# EAGLE board E-inkV0.9 (EAGLE 6.3)
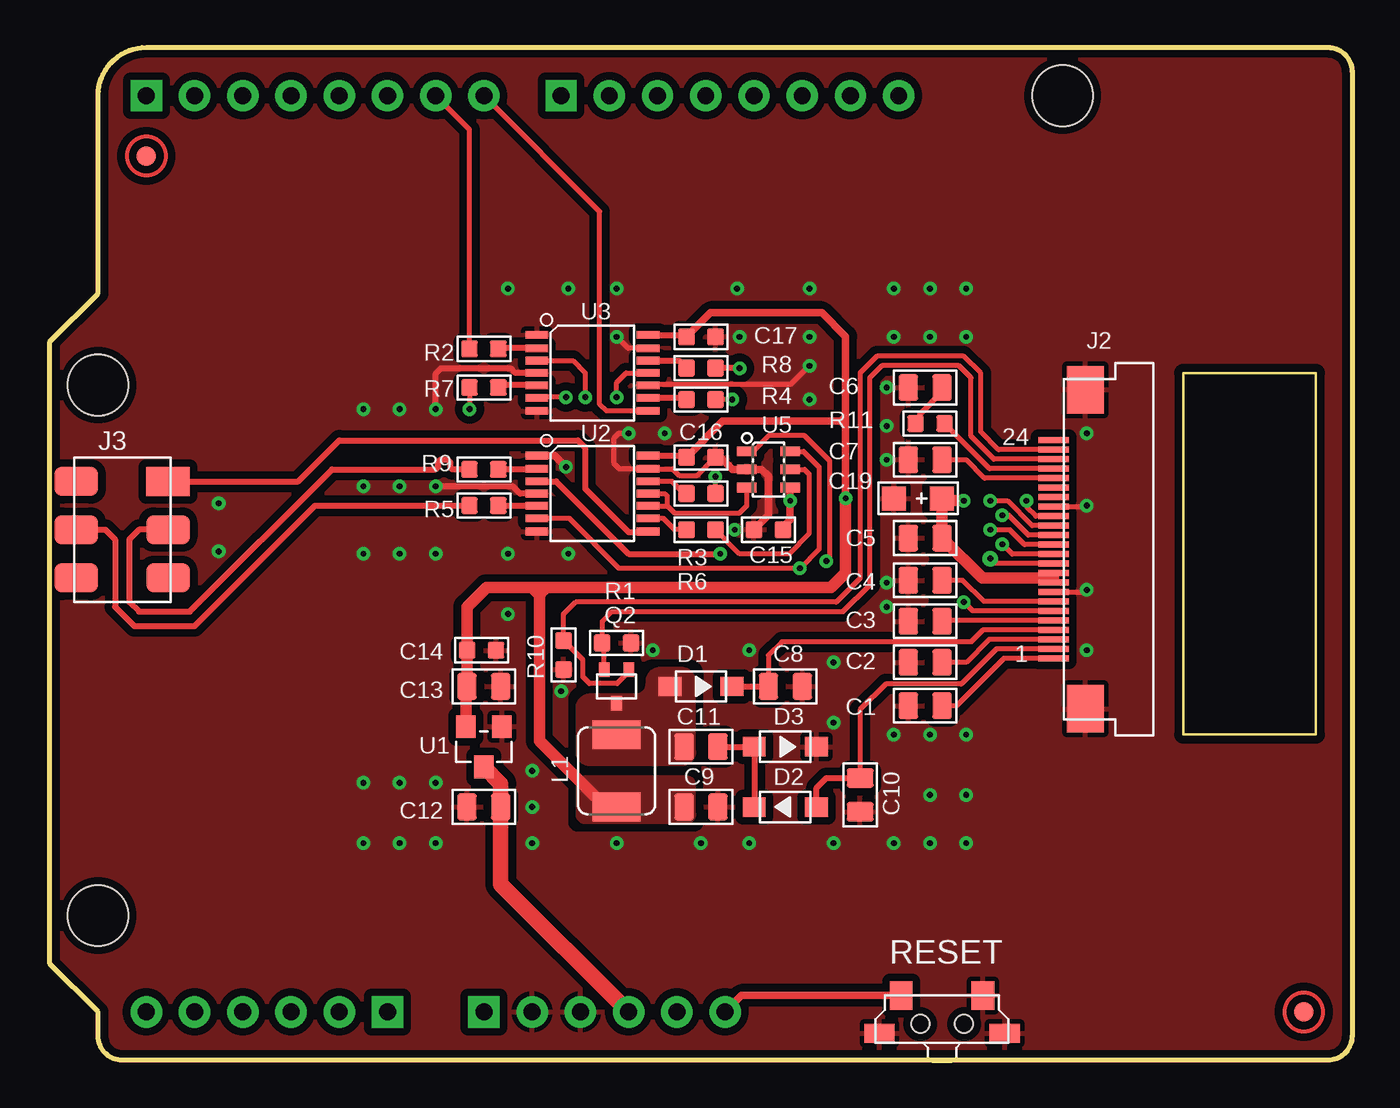
[diagram p0: board, top side]
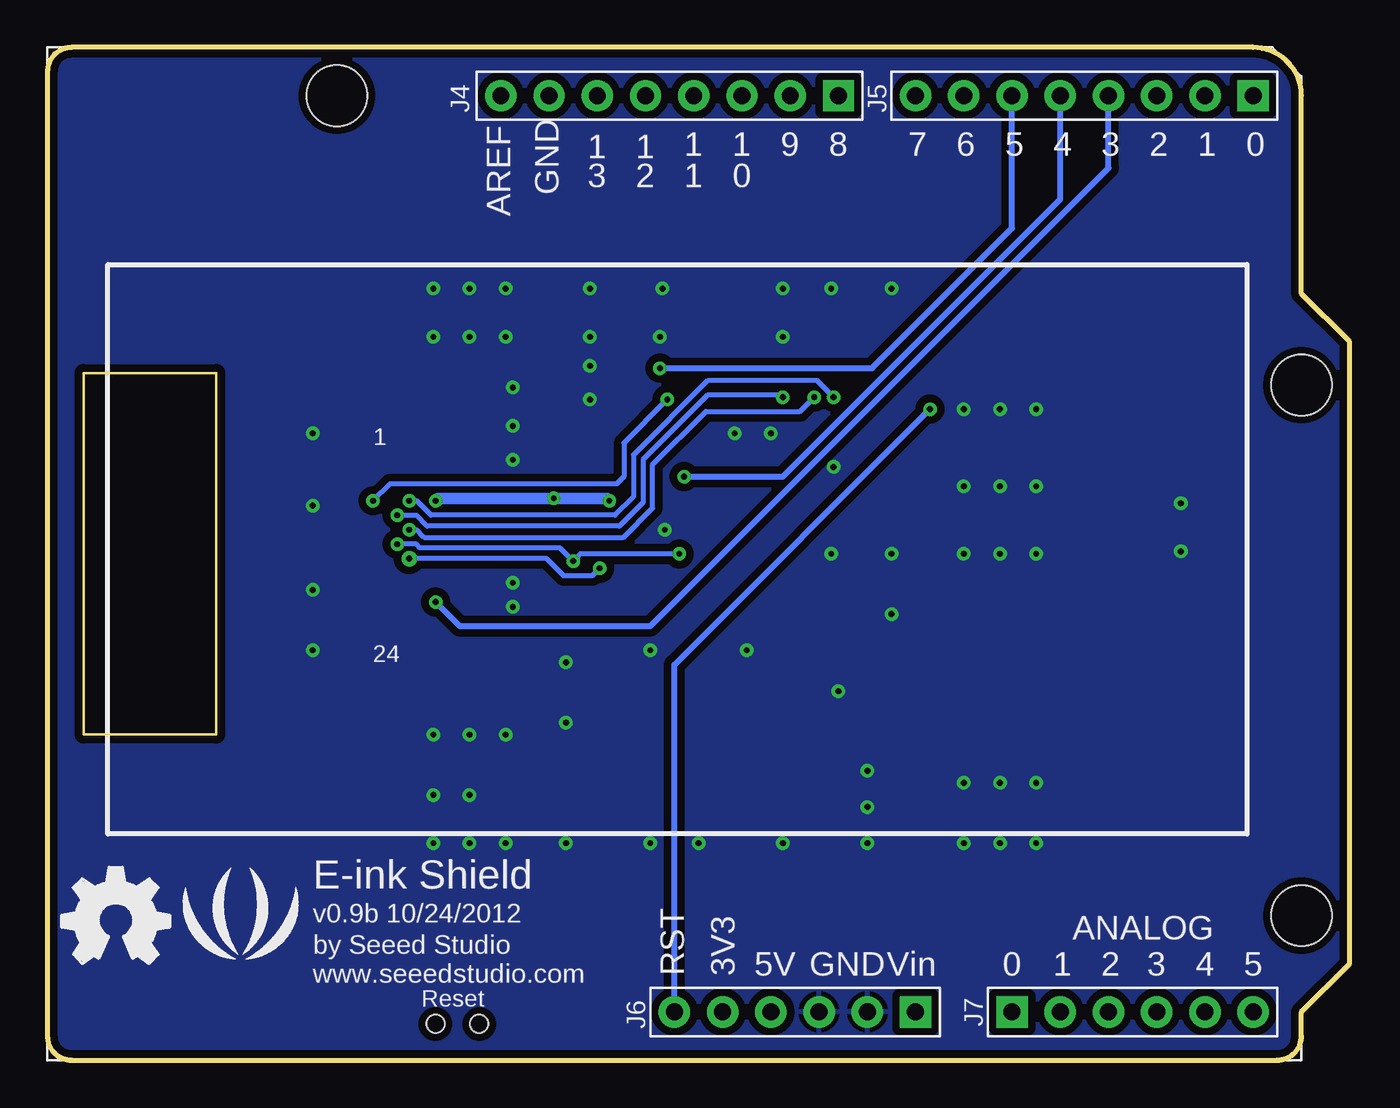
[diagram p1: board, bottom side, seen from below]

Size 68.58 x 53.34 mm. Coordinates in mm from the lower left corner, seen from the top.
Outline: 66.67,36.19 59.69,36.19 59.69,17.14 66.67,17.14 66.67,36.19
Outline: 68.58,52.07 68.58,1.27 arc-90 67.31,0 3.81,0 arc-90 2.54,1.27 2.54,2.54 0,5.08 0,37.85 2.54,40.39 2.54,50.8 arc-90 5.08,53.34 67.31,53.34 arc-90 68.58,52.07
Copper layers (1*16): Top 0.035mm / dielectric 1.5mm / Bottom 0.035mm
Design rules "default": minimum track width 10mil, minimum drill 12mil, track to track 8mil, track to pad 8mil, pad to pad 8mil, via to via 8mil, smd to smd 0mil, copper to edge 10mil, drill to drill 8mil, minimum pad ring 10mil, minimum via ring 8mil, stop-mask expansion 4mil, vias tented up to drill 100mil, thermal gap 10mil

## Footprints (pad centres in the part's own frame; a part is rotated, then mirrored left to right if it is on the bottom)
C0805 = smd 1.016 x 1.397: 1 -0.889,0; 2 0.889,0
C0603 = smd 0.889 x 0.889: 1 -0.762,0; 2 0.762,0
AVX-A = smd 1.27 x 1.27: + -1.27,0; - 1.27,0
SOD123-2.7X1.6 = smd 1.2 x 1.02: 1 -1.635,0; 2 1.635,0
24P-0.5 = smd 0.3 x 1.6: 1 -5.75,0.05; 2 -5.25,0.05; 3 -4.75,0.05; 4 -4.25,0.05; 5 -3.75,0.05; 6 -3.25,0.05; 7 -2.75,0.05; 8 -2.25,0.05; 9 -1.75,0.05; 10 -1.25,0.05; 11 -0.75,0.05; 12 -0.25,0.05; 13 0.25,0.05; 14 0.75,0.05; 15 1.25,0.05; 16 1.75,0.05; 17 2.25,0.05; 18 2.75,0.05; 19 3.25,0.05; 20 3.75,0.05; 21 4.25,0.05; 22 4.75,0.05; 23 5.25,0.05; 24 5.75,0.05 | smd 2.5 x 1.95: P1 -8.4,-1.625; P2 8.4,-1.625
1616BZ = smd 1.524 x 2.54: 1 -1.905,0; 2 1.905,0
ROUND-MARK-1.0 = smd 1.016 x 1.016: P$1 0,0
SOT323 = smd 0.559 x 0.762: 1 -0.65,-0.889; 2 0.65,-0.889; 3 0,0.889
R0603 = smd 0.889 x 0.889: 1 -0.762,0; 2 0.762,0
FOR_TEST_ALBERT_V6_4P-SMD-7X3.5X3.5 = smd 1.2 x 1.5: 1 -2.15,1.5; 2 2.15,1.5 | smd 1.6 x 1: S1 -3.3,-0.5; S2 3.3,-0.5 | hole 0.95: -1.15,0; 1.15,0
SOT23 = smd 1.016 x 1.2: 1 -0.95,-1.06; 2 0.95,-1.06; 3 0,1.06
TSSOP14 = smd 0.4 x 1.2: 1 -2,-2.925; 2 -1.3,-2.925; 3 -0.65,-2.925; 4 0,-2.925; 5 0.65,-2.925; 6 1.3,-2.925; 7 2,-2.925; 8 2,2.925; 9 1.3,2.925; 10 0.65,2.925; 11 0,2.925; 12 -0.65,2.925; 13 -1.3,2.925; 14 -2,2.925
ARDUINO-ISP-SMD = drill 0.889 pad 1.651 square: 1 63.5,50.8; 9 41.656,50.8; 17 50.8,2.54; 23 45.72,2.54 | drill 0.889 pad 1.651: 2 60.96,50.8; 3 58.42,50.8; 4 55.88,50.8; 5 53.34,50.8; 6 50.8,50.8; 7 48.26,50.8; 8 45.72,50.8; 10 39.116,50.8; 11 36.576,50.8; 12 34.036,50.8; 13 31.496,50.8; 14 28.956,50.8; 15 26.416,50.8; 16 23.876,50.8; 18 53.34,2.54; 19 55.88,2.54; 20 58.42,2.54; 21 60.96,2.54; 22 63.5,2.54; 24 43.18,2.54; 25 40.64,2.54; 26 38.1,2.54; 27 35.56,2.54; 28 33.02,2.54 | smd 2.286 x 1.524 bottom: 31 67.183,30.48; 32 67.183,27.94; 33 67.183,25.4; 34 62.357,25.4; 35 62.357,27.94; 36 62.357,30.48 | hole 3.2: 15.24,50.8; 66.04,35.56; 66.04,7.62
SOT23-6 = smd 0.508 x 1.016: 1 -0.95,-1.143; 2 0,-1.143; 3 0.95,-1.143; 4 0.95,1.143; 5 0,1.143; 6 -0.95,1.143

## Placement (x,y rotation side)
C1  1uF/6V  [C0805]  46.1,18.67 180 top
C2  1uF/25V  [C0805]  46.1,20.96 0 top
C3  1uF/25V  [C0805]  46.1,23.11 0 top
C4  1uF/25V  [C0805]  46.1,25.27 180 top
C5  1uF/25V  [C0805]  46.1,27.5 180 top
C6  1uF/25V  [C0805]  46.1,35.43 0 top
C7  1uF/25V  [C0805]  46.1,31.62 0 top
C8  1uF/50V  [C0805]  38.73,19.68 0 top
C9  10uF  [C0805]  34.29,13.33 0 top
C10  1uF/50V  [C0805]  42.67,13.97 270 top
C11  4.7uF/50V  [C0805]  34.29,16.51 180 top
C12  1uF  [C0805]  22.86,13.33 0 top
C13  1uF  [C0805]  22.86,19.68 180 top
C14  100nF  [C0603]  22.73,21.59 180 top
C15  100nF  [C0603]  37.85,27.94 180 top
C16  100nF  [C0603]  34.29,31.75 180 top
C17  100nF  [C0603]  34.29,38.1 180 top
C19  10uF  [AVX-A]  45.72,29.59 180 top
D1  B0540W  [SOD123-2.7X1.6]  34.29,19.68 0 top
D2  B0540W  [SOD123-2.7X1.6]  38.73,13.33 180 top
D3  B0540W  [SOD123-2.7X1.6]  38.73,16.51 0 top
J2  FPC_CONNECTOR  [24P-0.5]  52.9,26.91 90 top
L1  CSAC0420-10R/10uH  [1616BZ]  29.84,15.24 90 top
P1  [ROUND-MARK-1.0]  5.08,47.62 0 top
P2  [ROUND-MARK-1.0]  66.04,2.54 0 top
Q2  SI1304BDL  [SOT323]  29.84,19.68 180 top
R1  0.47  [R0603]  29.84,21.97 0 top
R2  3K3  [R0603]  22.86,37.46 0 top
R3  3K3  [R0603]  34.29,29.85 180 top
R4  3K3  [R0603]  34.29,34.8 180 top
R5  3K3  [R0603]  22.86,29.21 0 top
R6  3K3  [R0603]  34.29,27.94 180 top
R7  3K3  [R0603]  22.86,35.43 0 top
R8  3K3  [R0603]  34.29,36.45 180 top
R9  3K3  [R0603]  22.86,31.11 0 top
R10  100K  [R0603]  27.05,21.34 90 top
R11  1K  [R0603]  46.35,33.53 0 top
RESET  [FOR_TEST_ALBERT_V6_4P-SMD-7X3.5X3.5]  46.99,1.9 0 top
U1  XC6206MR  [SOT23]  22.86,16.51 180 top
U2  74VHC125PW  [TSSOP14]  28.57,29.85 270 top
U3  74VHC125PW  [TSSOP14]  28.57,36.19 270 top
U4  ARDUINO  [ARDUINO-ISP-SMD]  68.58,0 0 bottom
U5  GT20L16P1Y  [SOT23-6]  37.85,31.11 270 top
U$25  [LOGO_SILK]  58.42,6.99 0 bottom
U$26  [OSHW_FILLX200_NOTEXT]  67.82,5.08 0 bottom

## Library data of the parts
C1-C17 C19 D1-D3 L1 R1-R11 = Discrete
J2 Q2 U2 U3 U5 = template
P1 P2 = Discrete; PARTNO: DNP
RESET = TFT_Touch
U1 = IC
U4 = moudle
U$25 U$26 = Logo

## Nets
3V3: C5.1 C9.1 C13.2 C14.2 C15.1 C16.2 C17.2 C19.+ J2.9 J2.10 L1.1 U1.2 U2.14 U3.14 U5.4
5V: C12.2 U1.3 U4.26
BUSY: U3.8 U4.8
BUSY#: J2.16 R4.1
CS1: R2.1 U4.7
CS2: R3.1 U4.5
CS#: J2.13 U3.3
D/C: R8.1 U4.6
D/C#: J2.14 U3.11
GDR: J2.23 Q2.1 R10.2
GND: C1.2 C2.1 C3.1 C4.2 C5.2 C6.1 C7.1 C8.2 C9.2 C10.2 C12.1 C13.1 C14.1 C15.2 C16.1 C17.1 C19.- D3.2 J2.8 J2.17 J2.P1 J2.P2 R1.2 R10.1 RESET.2 RESET.S1 RESET.S2 U1.1 U2.1 U2.4 U2.7 U2.13 U3.1 U3.4 U3.7 U3.10 U3.13 U4.24 U4.25 U5.2
GT_CS: U2.10 U2.11 U5.3
GT_SO: R6.1 U5.5
MISO: U2.8 U4.36
MOSI: R5.1 U4.32
N$1: C11.1 D2.2 D3.1
N$2: C11.2 D1.1 L1.2 Q2.3
N$3: R6.2 U2.9
N$4: R9.2 U2.2
N$5: R4.2 U3.9
N$6: R2.2 U3.2
N$7: R7.2 U3.5
N$8: R3.2 U2.12
N$9: R5.2 U2.5
N$10: R8.2 U3.12
N$12: C6.2 R11.1
NC: J2.24
PREVGH: C8.1 D1.2 J2.4
PREVGL: C10.1 D2.1 J2.2
RES#: J2.15 U3.6
RESE: J2.22 Q2.2 R1.1
RST: R7.1 RESET.1 U4.28
SCK: R9.1 U4.35
SCLK: J2.12 U2.3 U5.1
SI: J2.11 U2.6 U5.6
TSCL: J2.19
TSDA: J2.18
VCOM: C1.1 J2.1
VDD: C4.1 J2.7
VGH: C7.2 J2.20
VGL: J2.21 R11.2
VPP: J2.6 U4.4
VSH: C3.2 J2.5
VSL: C2.2 J2.3

## Tracks (layer width: path | path; a pad name or v marks a point on that pad's centre or on a via)
3V3  (via drill 0.3 pad 0.64)
  Top 0.254: 33.4,13.59 C9.1 | J2.10 52.85,25.38 J2.9
  Top 0.305: U3.14 33.43,38.19 C17.2 | U2.14 33.43,31.85 C16.2
  Top 0.406: C15.1 38.61,28.07 38.99,28.45 v38.99,29.46 U5.4 | v41.91,29.59 41.91,33.4 | 41.91,33.4 41.91,33.66 | 41.91,33.66 41.91,33.91 | 41.91,33.91 41.91,38.11 40.65,39.37 34.8,39.37 C17.2 | C16.2 35.43,33.66 41.66,33.66 | 41.66,33.66 41.91,33.66 | 41.66,33.66 41.91,33.91 | 41.66,33.66 41.91,33.4
  Top 0.61: C5.1 C19.+ 46.99,29.46 v48.13,29.46 | 25.4,24.89 22.99,24.89 21.97,23.88 C14.2 C13.2 21.91,19.62 U1.2 | 25.4,24.89 25.78,24.89 | 25.78,24.89 41.15,24.89 41.91,25.65 v41.91,29.59 | 29.02,13.59 25.78,16.83 25.78,24.51 | 25.78,24.51 25.78,24.89 | 25.78,24.51 26.03,24.76 | 25.78,24.51 25.4,24.89 | C5.1 46.99,27.18 | 52.85,25.38 49.1,25.38 C5.1
  Bottom 0.61: v38.99,29.46 39.12,29.59 v41.91,29.59 48.01,29.59 v48.13,29.46
  pour Top (isolate 0.254, no thermals): 28.19,12.57 33.53,12.57 arc90 33.91,12.95 33.91,14.48 arc90 33.53,14.86 28.19,14.86 arc90 27.81,14.48 27.81,12.95 arc90
5V
  Top 0.813: U1.3 23.75,14.56 C12.2 23.75,9.27 U4.26
BUSY
  Top 0.254: 31.27,34.19 29.3,34.19 28.96,34.54 28.96,44.7 U4.8
  Top 0.305: U3.8 31.27,34.19
BUSY#  (via drill 0.3 pad 0.64)
  Top 0.254: v35.94,34.8 R4.1 | J2.16 51.92,28.66 51.43,29.15 v51.43,29.46
  Bottom 0.254: v35.94,34.8 38.23,32.51 38.23,30.73 38.61,30.35 39.12,30.35 50.55,30.35 v51.43,29.46
CS1
  Top 0.254: R2.1 22.1,49.02 U4.7
CS2  (via drill 0.3 pad 0.64)
  Top 0.254: R3.1 v35.05,30.73
  Bottom 0.305: v35.05,30.73 29.84,30.73 15.24,45.34 U4.5
CS#  (via drill 0.3 pad 0.64)
  Top 0.254: 25.66,36.83 U3.3 27.54,36.84 28.19,36.19 v28.19,34.92 | J2.13 51.33,27.16 50.55,27.94 v49.53,27.94
  Bottom 0.254: v28.19,34.92 28.96,34.16 33.91,34.16 36.7,31.37 36.7,29.08 38.25,27.53 48.74,27.53 49.15,27.94 v49.53,27.94
D/C  (via drill 0.3 pad 0.64)
  Top 0.305: v36.32,36.45 R8.1
  Bottom 0.305: U4.6 17.78,43.81 25.15,36.45 v36.32,36.45
D/C#  (via drill 0.3 pad 0.64)
  Top 0.254: v29.84,34.92 29.84,35.69 30.35,36.19 U3.11 | J2.14 51.52,27.66 50.48,28.7 v50.16,28.7
  Bottom 0.254: v29.84,34.92 29.97,35.05 33.78,35.05 37.21,31.62 37.21,29.38 38.45,28.13 48.58,28.13 49.15,28.7 v50.16,28.7
GDR
  Top 0.254: Q2.1 30.49,20.46 29.87,19.84 28.42,19.84 28.07,20.19 28.07,21.08 R10.2 27.05,23.5 27.69,24.13 41.42,24.13 42.67,25.38 42.67,36.19 43.56,37.08 48.12,37.08 49.02,36.19 49.02,33.1 49.96,32.16 J2.23
GND  (via drill 0.3 pad 0.64)
  Top 0.254: U3.13 30.45,37.49 v29.84,38.1 | 34.92,31.62 34.1,30.8 33.14,30.8 32.8,31.14 U2.13 29.99,31.14 29.72,31.42 29.72,32.77 29.97,33.02 v30.48,33.02 | U3.10 31.55,35.6 39.03,35.6 v40.01,36.58 | J2.17 54.56,29.16 | J2.8 54.51,24.66
  Top 0.305: U2.4 24.76,29.85 24.38,30.23 v20.32,30.23 | U3.4 24.51,36.19 24.26,36.45 20.6,36.45 20.32,36.16 v20.32,34.29 | 54.56,29.16 v54.61,29.21 | 54.51,24.66 v54.61,24.76
  Top 0.406: C15.2 37.85,28.7 37.85,30.76 37.49,31.11 U5.2 35.94,31.11 35.31,31.75 C16.1 | U2.1 26.57,31.85 v27.18,31.24
  other vias: 36.07,27.94 44.07,23.88 44.07,25.15 26.92,19.43 24.13,23.5 25.4,15.24 25.4,13.33 32.38,33.02 36.32,38.1 18.41,30.23 16.51,30.23 24.13,40.64 27.3,40.64 44.07,35.43 44.07,33.4 44.07,31.62 46.35,17.14 40.01,38.1 40.01,34.8 31.75,21.59 41.27,20.96 46.35,13.97 36.83,21.59 41.27,17.78 25.4,11.43 29.84,11.43 34.29,11.43 41.27,11.43 46.35,11.43 44.45,38.1 46.35,38.1 48.26,38.1 36.83,11.43 29.84,40.64 36.2,40.64 40.01,40.64 44.45,40.64 46.35,40.64 48.26,40.64 27.3,26.67 24.13,26.67 20.32,26.67 18.41,26.67 16.51,26.67 20.32,11.43 20.32,14.61 16.51,14.61 18.41,14.61 18.41,11.43 16.51,11.43 48.26,17.14 48.26,13.97 48.26,11.43 44.45,17.14 44.45,11.43 18.41,34.29 16.51,34.29 8.89,26.8 8.89,29.34 54.61,21.59 54.61,33.02
  pour Top: 78.1,52.7 76.2,52.7 76.2,50.16 78.1,50.16
  pour Bottom (isolate 0.406, rank 6): 68.58,53.34 0,53.34 0,0 68.45,0 68.58,0.13
  pour Top (isolate 0.406, rank 6): 68.58,53.34 0,53.34 0,0 68.45,0 68.58,0.13
GT_CS
  Top 0.254: U2.10 32.53,29.19 | 32.53,29.19 32.89,28.83 36.32,28.83 36.7,29.21 U5.3 | U2.11 32.38,29.85 32.51,29.72 32.51,29.21 32.53,29.19
GT_SO
  Top 0.254: U5.5 39.75,31.11 39.99,30.87 39.99,27.74 38.92,26.67 36.32,26.67 R6.1
MISO
  Top 0.305: U2.8 31.47,27.81 30.48,27.81 28.19,30.1 28.19,32.26 27.81,32.64 15.24,32.64 13.08,30.48 U4.36
MOSI
  Top 0.305: U4.32 2.92,27.94 3.43,27.43 3.43,23.88 4.45,22.86 7.62,22.86 13.97,29.21 R5.1
N$1
  Top 0.305: C11.1 D3.1 D2.2
N$2
  pour Top (isolate 0.254, no thermals): 27.81,18.54 27.81,16.26 arc90 28.45,15.62 33.27,15.62 arc90 33.91,16.26 33.91,19.94 arc90 33.27,20.57 32.13,20.57 arc90 31.5,19.94 31.5,19.81 arc-90 30.86,19.18 28.45,19.18 arc90
N$3
  Top 0.254: R6.2 32.89,27.94 32.29,28.54 U2.9
N$4
  Top 0.305: U2.2 23.65,31.14 R9.2
N$5
  Top 0.305: U3.9 33.43,34.89 R4.2
N$6
  Top 0.305: U3.2 23.65,37.49 R2.2
N$7
  Top 0.305: U3.5 23.73,35.55 R7.2
N$8
  Top 0.254: R3.2 33.4,29.85 32.77,30.48 31.51,30.48 U2.12
N$9
  Top 0.305: U2.5 23.64,29.19 R5.2
N$10
  Top 0.305: U3.12 33.13,36.84 R8.2
N$12
  Top 0.305: R11.1 45.85,33.78 45.85,34.04 46.99,35.18 C6.2
PREVGH
  Top 0.254: C8.1 37.85,21.34 38.54,22.03 48.51,22.03 49.14,22.66 J2.4
  Top 0.305: D1.2 C8.1
PREVGL
  Top 0.254: C10.1 42.67,18.46 44.02,19.81 48.01,19.81 49.85,21.66 J2.2
  Top 0.305: C10.1 40.89,14.86 40.39,14.35 40.39,13.33 D2.1
RES#  (via drill 0.3 pad 0.64)
  Top 0.254: v27.18,34.92 25.68,34.92 U3.6 | v49.53,29.46 50.42,29.46 51.72,28.16 J2.15
  Bottom 0.254: v27.18,34.92 28.07,35.81 33.78,35.81 37.72,31.88 37.72,29.67 38.69,28.7 48.39,28.7 49.15,29.46 v49.53,29.46
RESE
  Top 0.254: Q2.2 29.2,21.86 R1.1 29.08,23.11 29.59,23.62 41.77,23.62 43.18,25.03 43.18,35.94 43.81,36.58 47.88,36.58 48.51,35.95 48.51,32.86 49.71,31.66 J2.22
RST  (via drill 0.3 pad 0.64)
  Top 0.254: R7.1 v22.1,34.29
  Top 0.406: RESET.1 36.42,3.4 U4.28
  Bottom 0.305: U4.28 35.56,20.83 v22.1,34.29
SCK
  Top 0.305: U4.35 4.7,27.94 4.19,27.43 4.19,24.13 4.7,23.62 7.37,23.62 14.86,31.11 20.32,31.11 20.45,31.24 20.45,31.5 20.57,31.62 20.95,31.62 21.08,31.5 21.08,31.24 21.21,31.11 R9.1
SCLK  (via drill 0.3 pad 0.64)
  Top 0.254: v40.89,26.29 41.06,26.46 41.06,31.58 39.75,32.89 37.85,32.89 37.02,32.06 U5.1 | 25.63,30.48 U2.3 | J2.12 50.68,26.66 v50.16,27.18
  Top 0.305: 25.63,30.48 26.67,30.48 30.48,26.67 v35.31,26.67
  Bottom 0.254: v35.31,26.67 40.51,26.67 v40.89,26.29 41.59,26.99 48.96,26.99 49.15,27.18 v50.16,27.18
SI  (via drill 0.3 pad 0.64, 0.3 pad 0.81)
  Top 0.254: U2.6 27.33,28.54 29.97,25.91 v39.5,25.91 40.51,26.92 40.51,31.25 39.69,32.06 U5.6 | J2.11 49.79,26.16 v49.53,26.42
  Bottom 0.254: v39.5,25.91 39.88,25.53 41.4,25.53 42.29,26.42 v49.53,26.42
VCOM
  Top 0.254: J2.1 50.24,21.16 47.75,18.67 C1.1
VDD
  Top 0.254: 46.99,25.4 C4.1 48.07,25.27 49.18,24.16 J2.7
VGH
  Top 0.254: J2.20 49.22,30.66 48.26,31.62 C7.2
VGL
  Top 0.254: J2.21 49.48,31.16 R11.2
VPP  (via drill 0.3 pad 0.64)
  Top 0.254: J2.6 48.6,23.66 v48.13,24.13
  Bottom 0.305: U4.4 12.7,46.99 36.83,22.86 46.86,22.86 v48.13,24.13
VSH
  Top 0.254: J2.5 47.04,23.16 C3.2
VSL
  Top 0.254: J2.3 49.46,22.16 48.26,20.96 C2.2

## Text on the board
tPlace: J3 | 24 | 1
bPlace: J5 | J4 | 1 | 24 | E-ink Shield | v0.9b 10/24/2012 | by Seeed Studio | www.seeedstudio.com | Reset | J7 | J6